# Altium PCB N20网关A.PcbDoc (part 2 of 2)
Units mil, origin at the board's own origin, x right, y up, seen from the top; angles counter-clockwise.
Board outline 6309.92 x 4341.03 mil, 2 copper layers (Top Layer, Bottom Layer); 157 components, 170 nets, 607 pads, 1300 vias.
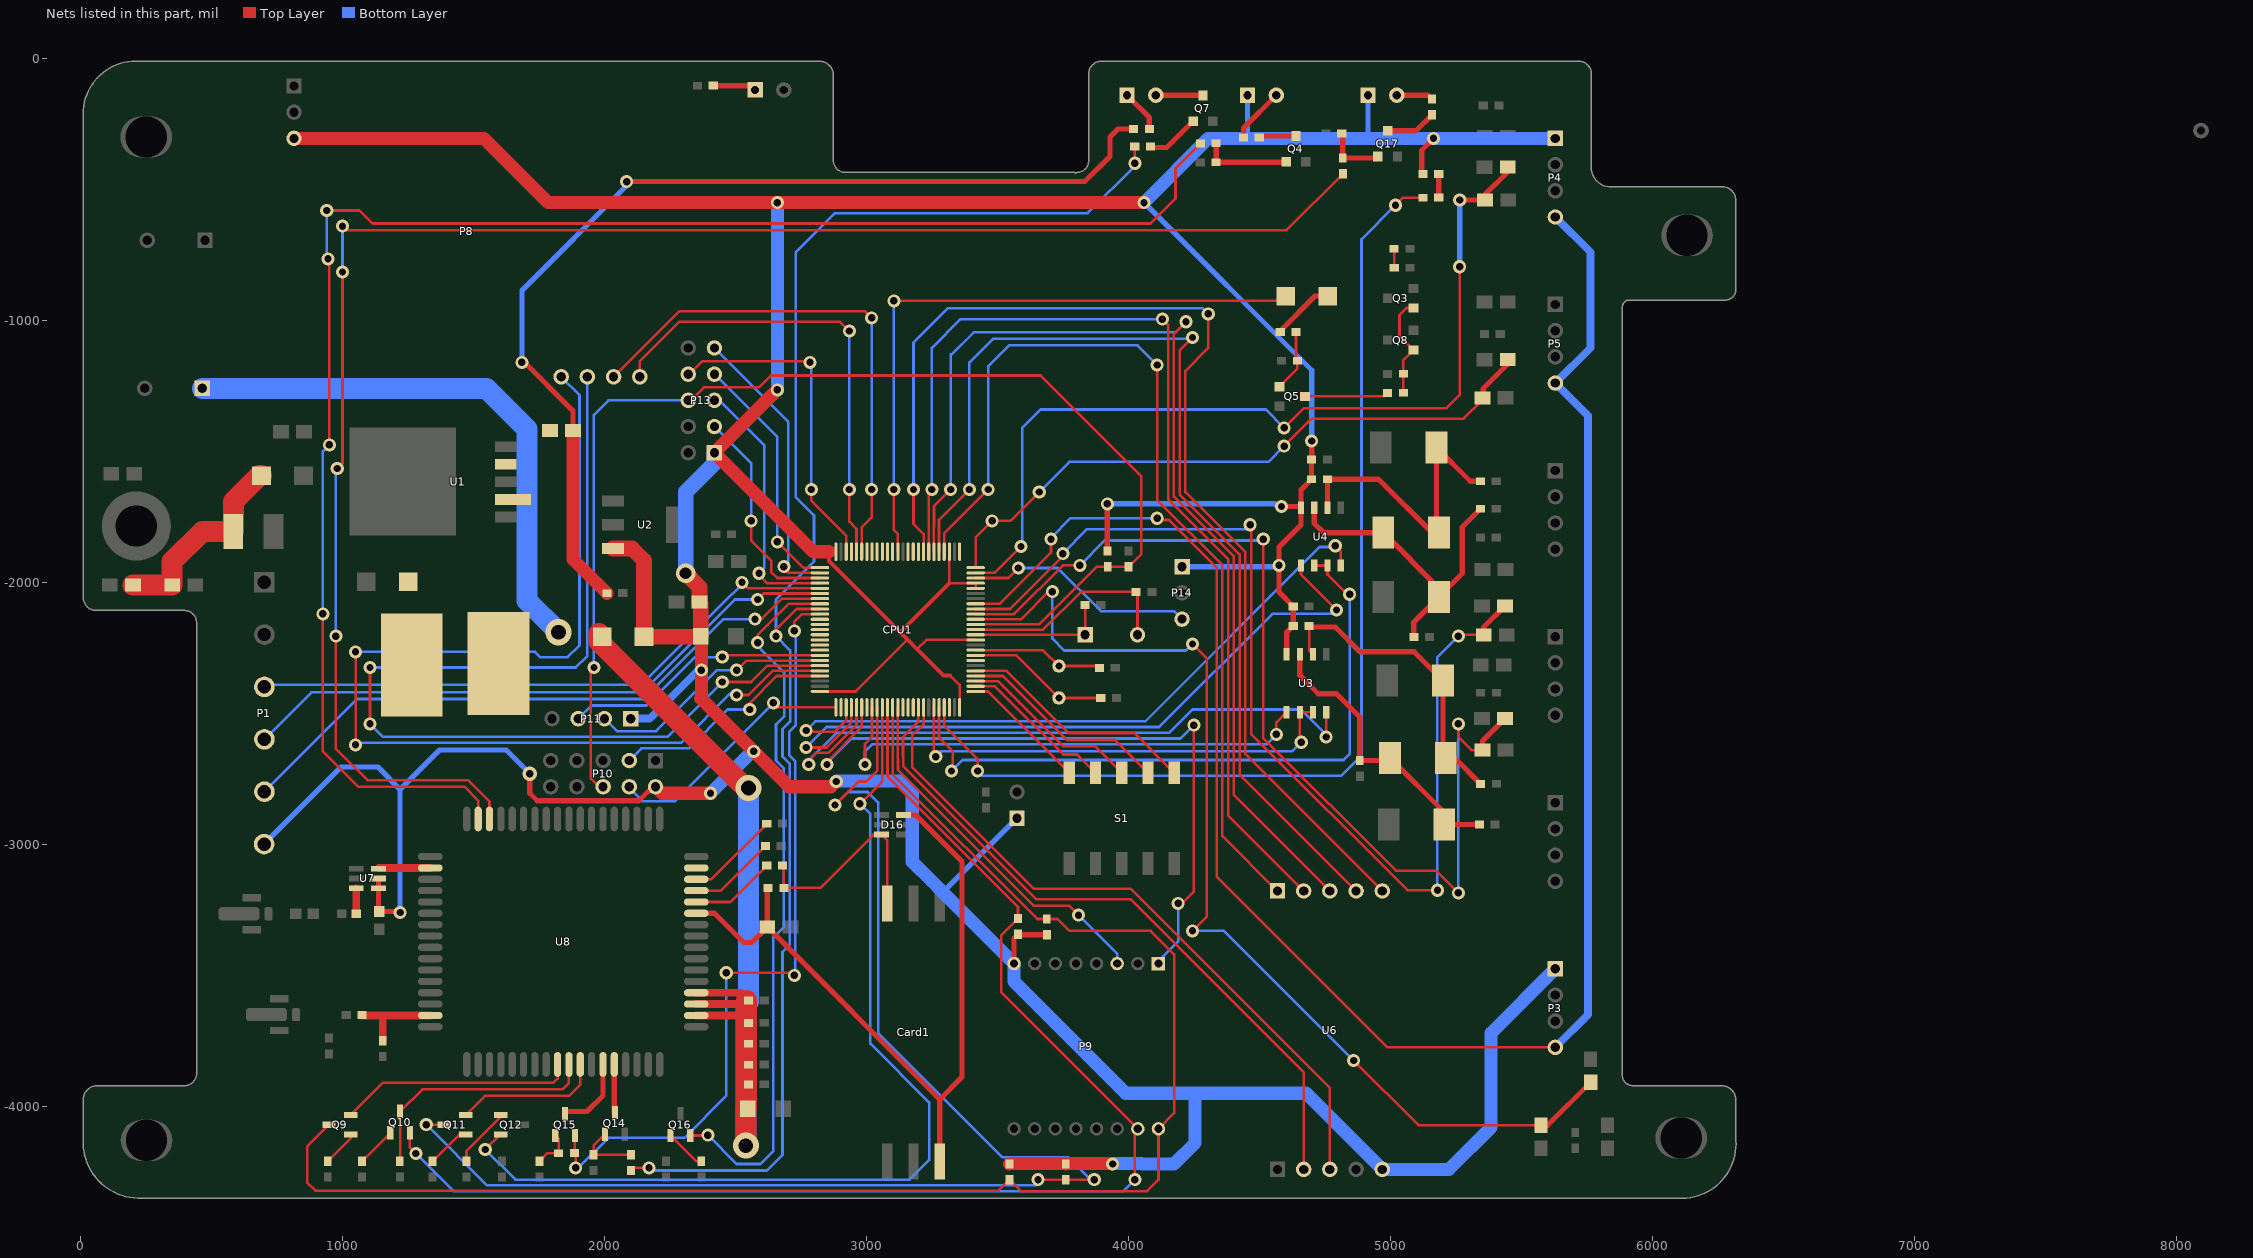
[diagram p2: the nets of this part, all layers, seen from the top]

## Via types
v1: diameter 28, hole 15, Top Layer to Bottom Layer, 1174 vias
v2: diameter 50, hole 28, Top Layer to Bottom Layer, 121 vias
v3: diameter 100, hole 56, Top Layer to Bottom Layer, 3 vias
v4: diameter 75, hole 45, Top Layer to Bottom Layer, 1 vias
v5: diameter 56, hole 28, Top Layer to Bottom Layer, 1 vias

## Nets (pads, with @x,y where several pads share a name; then routed paths per layer and width w, separated by ;. In a path a pad name is that pad's centre, name@x,y a point inside that pad or via, vN(x,y) a via of type N, cw(c..) or ccw(c..) an arc to the next point about the centre after c; other vN are vias at no path point) (continued)
NetCard1_6: Card1.6 D16.6 R46.1 R48.1 | length 809.6
  Top Layer w10: R46.1@2685,-3086 R48.1@2685,-3166 2825,-3166 3028.6,-2962.4 D16.6@3057.68,-2962.4 3080,-2984.72 Card1.6@3080,-3225.75
NetD2_1: D2.1 F1.1 R12.1 R13.1 | length 783.2
  Top Layer w80: R12.1@200,-2010 R13.1@350,-2010 350,-1920 465,-1805 F1.1@583.23,-1805 583.23,-1691.77 683.02,-1591.98 D2.1@690.98,-1591.98
NetD4_2: D4.2 L1.1 U1.2
NetD5_2: D5.2 D19.2 R20.1 R73.2 U3.7 | length 1137.9
  Top Layer w20: U3.7@4654.8,-2274.76 4654.8,-2354.8 4725,-2425 4795,-2425 4883.66,-2513.66 R73.2@4883.66,-2679.77 4988.93,-2679.77 D19.2@4998.7,-2670 5206.3,-2877.6 D5.2@5206.3,-2925 ; D5.2@5206.3,-2927.87 D5.2@5206.3,-2925 ; R20.1@5340,-2924 5207.3,-2924 D5.2@5206.3,-2925
NetD6_2: D6.2 D18.2 R3.1 R21.1 U4.7 | length 1266.9
  Top Layer w20: U4.7@4709.8,-1714.76 4709.8,-1774.8 4745,-1810 D18.2@4973.7,-1810 5186.3,-2022.6 D6.2@5186.3,-2055 ; R3.1@5090,-2209 5090,-2151.3 D6.2@5186.3,-2055 ; R21.1@5344.28,-1719 5275,-1788.28 5275,-1966.3 D6.2@5186.3,-2055
NetD8_2: D8.2 D19.1 R25.1 R72.1 U3.6 | length 1186.8
  Top Layer w10: R72.1@4694,-2170 R72.1@4690,-2166 4690,-2259.57 U3.6@4705.2,-2274.76 ; D19.1@5201.3,-2660 D19.1@5211.3,-2670 D19.1@5246,-2670
  Top Layer w20: R72.1@4694,-2170 4790,-2170 4885,-2265 5091.3,-2265 D8.2@5201.3,-2375 D19.1@5201.3,-2660 ; D19.1@5246,-2670 R25.1@5345,-2769
NetD9_2: D9.2 D18.1 R2.1 R26.1 U4.6 | length 1170.2
  Top Layer w20: U4.6@4760.2,-1714.76 4760,-1714.57 R2.1@4760,-1606 4955,-1606 5159,-1810 D18.1@5186.3,-1810 5176.3,-1800 D9.2@5176.3,-1485 5305.3,-1614 R26.1@5344.28,-1614
NetD10_2: D10.2 R51.2 | length 213.2
  Top Layer w20: R51.2@4439.77,-301.34 4439.77,-265.23 D10.2@4565,-140
NetD11_1: D11.1 R28.2 | length 166.5
  Top Layer w20: R28.2@2415.23,-103.66 2558.66,-103.66 D11.1@2575,-120
NetD12_1: D12.1 R29.1 | length 90
  Top Layer w20: D12.1@5185,-531 R29.1@5185,-441
NetD14_2: D14.2 R37.1 | length 240.3
  Top Layer w20: R37.1@4580,-1044 4580,-1040 4713.02,-906.98 D14.2@4761.21,-906.98
NetD15_1: D15.1 R40.2 | length 164
  Top Layer w20: D15.1@3995,-140 4080.23,-225.23 R40.2@4080.23,-268.66
NetD15_2: D15.2 Q7.3 | length 180
  Top Layer w20: D15.2@4105,-140 Q7.3@4285,-140
NetD17_2: D17.2 R71.2 | length 139.8
  Top Layer w20: D17.2@5025,-140 5143.89,-140 R71.2@5158.66,-154.77
NetL2_2: L2.2 U7.3 | length 97.6
  Top Layer w30: L2.2@1052.56,-3265 1052.68,-3264.88 U7.3@1052.68,-3167.4
NetLED1_2: LED1.2 R41.1 | length 72.8
  Top Layer w10: LED1.2@5014.77,-726.34 5014.77,-798.77 R41.1@5015,-799
NETLIGHT: R49.1 U8.51 | length 6373.7
  Top Layer w10: v2(925,-2120) 925,-2645 1060,-2780 1465,-2780 1518.07,-2833.07 U8.51@1518.07,-2902.99 ; v2(940,-580) 1065,-580 1115,-630 4085,-630 4180,-535 4180,-419 R49.1@4275,-324 ; v2(950,-1475) v2@950,-760
  Bottom Layer w10: v2(925,-2120) 925,-1500 v2(950,-1475) ; v2(940,-580) 940,-760 v2(945,-765)
NetQ3_2: Q3.2 Q8.2 R32.2 R34.1 | length 399.5
  Top Layer w10: R34.1@5050,-1276 5050.23,-1275.77 R32.2@5050.23,-1203.66 5050.23,-1150.6 Q8.2@5088.43,-1112.4 5036.02,-1060 5035,-1060 5035,-980 5062.6,-952.4 Q3.2@5088.43,-952.4
NetQ4_1: Q4.1 R49.2 R50.1 | length 337.9
  Top Layer w20: R50.1@4335,-396 Q4.1@4600.81,-396 ; R50.1@4335.23,-395.77 R49.2@4335.23,-323.66
NetQ4_3: Q4.3 R51.1 | length 134.8
  Top Layer w20: R51.1@4505.21,-295.79 Q4.3@4640,-295.79
NetQ5_2: Q5.2 R37.2 R39.2 | length 239.4
  Top Layer w10: Q5.2@4576.57,-1252.6 4645.23,-1183.94 R39.2@4645.23,-1153.66 4640.23,-1148.66 R37.2@4640.23,-1043.66
NetQ5_3: Q5.3 R34.2 | length 320.4
  Top Layer w10: Q5.3@4675,-1290 4976.11,-1290 R34.2@4989.77,-1276.34
NetQ7_1: Q7.1 R42.1 | length 188.3
  Top Layer w20: R42.1@4101,-340 4146.81,-340 Q7.1@4247.6,-239.21
NetQ9_1: Q9.1 R54.2 | length 138.7
  Top Layer w10: R54.2@943.66,-4209.77 1031.34,-4122.09 Q9.1@1031.34,-4107.4
NetQ10_1: Q10.1 R56.2 | length 153.6
  Top Layer w10: R56.2@1073.91,-4209.77 1074.17,-4209.77 Q10.1@1182.6,-4101.34
NetQ11_1: Q11.1 R58.2 | length 170.1
  Top Layer w10: R58.2@1343.66,-4209.77 1446.03,-4107.4 Q11.1@1471.34,-4107.4
NetQ12_1: Q12.1 R60.2 | length 231
  Top Layer w10: R60.2@1473.66,-4209.77 1473.66,-4171.34 1603.66,-4041.34 Q12.1@1603.66,-4032.6
NetQ14_1: Q14.1 R63.1 R64.2 | length 238.7
  Top Layer w10: R64.2@1958.66,-4184.77 1958.66,-4150.28 Q14.1@2002.6,-4106.34 ; R64.2@1958.89,-4185 R63.1@2101,-4185
NetQ15_1: Q15.1 R65.1 R66.2 | length 158.2
  Top Layer w10: R66.2@1752.32,-4209.77 1783.09,-4179 R65.1@1825,-4179 1825,-4123.74 Q15.1@1812.6,-4111.34
NetQ16_1: Q16.1 R68.2 | length 157.8
  Top Layer w10: Q16.1@2252.6,-4111.34 2351.03,-4209.77 R68.2@2369.66,-4209.77
NetQ17_1: Q17.1 R69.2 R70.1 | length 218.5
  Top Layer w20: R70.1@4818.66,-289.66 R69.2@4818.66,-379.77 Q17.1@4947.04,-379.77
NetQ17_3: Q17.3 R71.1 | length 194.2
  Top Layer w20: Q17.3@4990,-275.79 5098.21,-275.79 R71.1@5159,-215
NetR1_2: R1.2 U1.4
NIRQ: CPU1.33 U6.5 | length 4552.6
  Top Layer w10: v2(3180,-1645) 3180,-1776.89 3218.43,-1815.32 CPU1.33@3218.43,-1882.76 ; v2(4305,-975) 4305,-1105 4218,-1192 4218,-1654.66 4447,-1883.66 4447,-2655.31 U6.5@4969.49,-3177.8
  Bottom Layer w10: v2(3180,-1645) 3180,-1085 3312,-953 4283,-953 v2(4305,-975)
NRST: C26.2 CPU1.14 P10.8 P13.8 R43.2 | length 4805.3
  Top Layer w10: v2(1960,-2325) 1948.47,-2336.53 1948.47,-2748.47 1980,-2780 P10.8@1995,-2780 ; P13.8@2320,-1305 2330,-1305 2380,-1255 2590,-1255 2635,-1210 3665,-1210 4050,-1595 4050,-1891.57 C26.2@4001.34,-1940.23 R43.2@3921.34,-1940.23 3921.11,-1940 3880,-1940 3659.69,-2160.31 CPU1.14@3417.24,-2160.31
  Bottom Layer w10: v2(1960,-2325) 1960,-1360 2015,-1305 P13.8@2320,-1305
NSEL: CPU1.29 U6.1 | length 3685.6
  Top Layer w10: CPU1.29@3297.17,-1882.76 3297.17,-1812.83 v2(3465,-1645) ; v2(4110,-1170) 4110,-1685 4359,-1934 4359,-2969 4567.8,-3177.8 U6.1@4569.49,-3177.8
  Bottom Layer w10: v2(3465,-1645) 3465,-1175 3545,-1095 4035,-1095 v2(4110,-1170)
NTRST: CPU1.90
OSC32_IN: C24.2 CPU1.8 Y2.1 | length 544.6
  Top Layer w10: CPU1.8@3417.24,-2278.43 3572.4,-2278.43 Y2.1@3735,-2441.02 C24.2@3894.45,-2441.02
OSC32_OUT: C25.2 CPU1.9 Y2.2 | length 490.3
  Top Layer w10: CPU1.9@3417.24,-2258.74 3675,-2258.74 3675,-2258.98 Y2.2@3735,-2318.98 C25.2@3882.41,-2318.98
OSC_IN: C16.2 CPU1.12 Y1.1 | length 531.3
  Top Layer w10: CPU1.12@3417.24,-2199.68 3834.68,-2199.68 Y1.1@3835,-2200 C16.2@3835,-2086.57
OSC_OUT: C17.2 CPU1.13 Y1.2 | length 837.9
  Top Layer w10: CPU1.13@3417.24,-2180 3675,-2180 3818.66,-2036.34 C17.2@4029.77,-2036.34 4035,-2041.57 Y1.2@4035,-2200
PA0: CPU1.23 P14.3 | length 884.3
  Top Layer w10: CPU1.23@3417.24,-1983.15 3541.85,-1983.15 v2(3580,-1945)
  Bottom Layer w10: v2(3580,-1945) 3730,-1945 3895,-2110 4175,-2110 P14.3@4205,-2140
PA1: CPU1.24 R11.2 R77.2 | length 3433.5
  Top Layer w10: CPU1.24@3417.24,-1963.46 3489.69,-1963.46 v2(3590,-1863.15) ; v2(4595,-1410) 4670,-1335 5215,-1335 5265,-1285 v2(5265,-795)
  Top Layer w20: v2(5265.28,-540.28) R77.2@5361.96,-540.28 5361.96,-519.69 R11.2@5448.27,-433.38
  Bottom Layer w10: v2@3595,-1858.15 3595,-1410 3665,-1340 4525,-1340 v2(4595,-1410)
  Bottom Layer w20: v2(3590,-1863.15) v2@3595,-1858.15 ; v2(5265,-795) 5265.28,-794.72 v2(5265.28,-540.28)
PA2: CPU1.25 R9.2 R78.2 | length 2461.2
  Top Layer w10: CPU1.25@3417.24,-1943.78 3417.24,-1827.76 v2(3480,-1765) 3550,-1765 v2(3660,-1655) ; v2(4595,-1480) 4700,-1375 5280,-1375 R78.2@5351.96,-1303.04
  Top Layer w20: R78.2@5351.96,-1303.04 R78.2@5351.96,-1295.28 5355,-1292.24 5355,-1260 5448.04,-1166.96 R9.2@5448.04,-1149.72
  Bottom Layer w10: v2(3660,-1655) 3775,-1540 4535,-1540 v2(4595,-1480)
PA3: CPU1.26
PA5: CPU1.30 U6.4 | length 4073.8
  Top Layer w10: CPU1.30@3277.48,-1882.76 3277.48,-1760.85 v2(3393.33,-1645) ; v2(4245,-1065) 4196,-1114 4196,-1663.77 4425,-1892.77 4425,-2733.31 U6.4@4869.49,-3177.8
  Bottom Layer w10: v2(3393.33,-1645) 3393.33,-1160 3483.33,-1070 4240,-1070 v2(4245,-1065)
PA6: CPU1.31 U6.3 | length 4168.1
  Top Layer w10: CPU1.31@3257.8,-1882.76 3257.8,-1787.2 3258.11,-1786.89 ; 3258.11,-1787.2 3258.11,-1786.89 ; v2(3321.67,-1645) 3258.11,-1708.56 3258.11,-1786.89 ; v2(4220,-1005) 4174,-1051 4174,-1672.89 4403,-1901.89 4403,-2811.31 U6.3@4769.49,-3177.8
  Bottom Layer w10: v2(3321.67,-1645) 3321.67,-1130 3325,-1130 3410,-1045 4180,-1045 v2(4220,-1005)
PA7: CPU1.32 U6.2 | length 4114.5
  Top Layer w10: CPU1.32@3238.11,-1882.76 3238.11,-1656.89 v2(3250,-1645) ; v2(4130,-995) 4152,-1017 4152,-1682 4381,-1911 4381,-2889.31 U6.2@4669.49,-3177.8
  Bottom Layer w10: v2(3250,-1645) 3250,-1105 3360,-995 v2(4130,-995)
PA8: CPU1.67
PA9: CPU1.68 P11.3 | length 1022.8
  Top Layer w10: v2(2450,-2285) 2456.57,-2278.43 CPU1.68@2822.76,-2278.43
  Bottom Layer w10: P11.3@1900,-2520 1950,-2470 2160,-2470 2345,-2285 v2(2450,-2285)
PA10: CPU1.69 P11.2 | length 955.7
  Top Layer w10: v2(2505,-2335) 2541.57,-2298.43 2731.57,-2298.43 ; 2733.29,-2298.43 2731.57,-2298.43 ; CPU1.69@2822.76,-2298.11 2731.89,-2298.11 2731.57,-2298.43
  Bottom Layer w10: P11.2@2000,-2520 2047.47,-2567.47 2196.92,-2567.47 2429.4,-2335 v2(2505,-2335)
PA11: CPU1.70 P8.3 | length 3979.4
  Top Layer w10: v2(1105,-2540) v2(1105,-2325) ; v2(2450,-2380) 2560,-2380 2622.2,-2317.8 CPU1.70@2822.76,-2317.8
  Bottom Layer w10: v2(1105,-2540) 1154.47,-2589.47 2240.53,-2589.47 v2(2450,-2380) ; v2(1105,-2325) 1890,-2325 1935,-2280 P8.3@1935,-1215
PA12: CPU1.71 P8.2 | length 4184.8
  Top Layer w10: v2(1050,-2620) v2(1050,-2265) ; v2(2505,-2430) 2550,-2430 2642.52,-2337.48 CPU1.71@2822.76,-2337.48
  Bottom Layer w10: v2(1050,-2620) 1058.53,-2611.47 2293.53,-2611.47 2480,-2425 2500,-2425 v2(2505,-2430) ; v2(1050,-2265) 1735,-2265 1755,-2285 1860,-2285 1905,-2240 1905,-1285 P8.2@1835,-1215
PB0: CPU1.35
PB1: CPU1.36
PB5: CPU1.91
PB6: CPU1.92 U6.7 | length 2632.3
  Top Layer w10: CPU1.92@3198.74,-2477.24 3198.74,-2531.26 3140,-2590 3140,-2665.46 3140.63,-2666.09 3140.63,-2700.63 3650,-3210 4010,-3210 4669.49,-3869.49 U6.7@4669.49,-4240.79
PB7: CPU1.93 U6.8 | length 2658.7
  Top Layer w10: CPU1.93@3218.43,-2477.24 3218.43,-2541.57 3175,-2585 3175,-2705 3640,-3170 4010,-3170 4769.49,-3929.49 U6.8@4769.49,-4240.79
PB8: CPU1.95 U3.2 U3.3 | length 1775.8
  Top Layer w10: CPU1.95@3257.8,-2477.24 3257.8,-2657.8 v2(3265,-2665) ; v2(4660,-2610) 4654.8,-2604.8 U3.2@4654.8,-2495.24 U3.3@4705.2,-2495.24
  Bottom Layer w10: v2(3265,-2665) 3285,-2645 4625,-2645 v2(4660,-2610)
PB9: CPU1.96 U4.2 U4.3 | length 2624.6
  Top Layer w10: CPU1.96@3277.48,-2477.24 3277.48,-2592.48 3330,-2645 3330,-2715 v2(3325,-2720) ; U4.2@4709.8,-1935.24 U4.3@4760.2,-1935.24 4760.2,-1970.2 4835,-2045 v2(4845,-2045)
  Bottom Layer w10: v2(3325,-2720) 3367,-2678 4822,-2678 4845,-2655 v2(4845,-2045)
PB10: CPU1.47
PB11: CPU1.48 P13.9 | length 1267.8
  Top Layer w10: P13.9@2320,-1205 2325,-1205 2375,-1155 2780,-1155 v2(2785,-1160) ; v2(2790,-1645) 2790,-1688.28 2923.15,-1821.43 CPU1.48@2923.15,-1882.76
  Bottom Layer w10: v2(2785,-1160) 2790,-1165 v2(2790,-1645)
PB12: CPU1.51 P13.4 | length 943.1
  Top Layer w10: v2(2660,-1845) 2758.78,-1943.78 CPU1.51@2822.76,-1943.78
  Bottom Layer w10: P13.4@2420,-1205 2660,-1445 v2(2660,-1845)
PB13: CPU1.52 P13.5 | length 1109.3
  Top Layer w10: v2(2685,-1940) 2685,-1945 2703.46,-1963.46 CPU1.52@2822.76,-1963.46
  Bottom Layer w10: P13.5@2420,-1105 2702,-1387 2702,-1923 v2(2685,-1940)
PB14: CPU1.53 P13.2 | length 840.3
  Top Layer w10: v2(2560,-1765) 2560,-1840 2636.87,-1916.87 2636.87,-1959.98 2660,-1983.15 CPU1.53@2822.76,-1983.15
  Bottom Layer w10: P13.2@2420,-1405 2560,-1545 v2(2560,-1765)
PB15: CPU1.54 P13.3 | length 1011.5
  Top Layer w10: v2(2590,-1965) 2590,-1972.5 2620.33,-2002.83 CPU1.54@2822.76,-2002.83
  Bottom Layer w10: P13.3@2420,-1305 2440,-1305 2610,-1475 2610,-1945 v2(2590,-1965)
PC0: CPU1.15 R10.2 R76.2 | length 4116.6
  Top Layer w10: CPU1.15@3417.24,-2140.63 3589.37,-2140.63 3695,-2035 v2(3710,-2035) ; v2(4245,-3330) 4300,-3275 4300,-2290 v2(4245,-2235) ; v2(4860,-3825) 5106.96,-4071.96 R10.2@5574.72,-4071.96
  Top Layer w20: R10.2@5574.72,-4071.96 5601.36,-4071.96 R76.2@5765.28,-3908.04
  Bottom Layer w10: v2(3710,-2035) 3710,-2215 3755,-2260 4220,-2260 v2(4245,-2235) ; v2(4245,-3330) 4365,-3330 v2(4860,-3825)
PC1: CPU1.16 R8.2 R75.2 | length 3936
  Top Layer w10: CPU1.16@3417.24,-2120.94 3564.06,-2120.94 3750,-1935 v2(3815,-1935) ; v2(4515,-1835) 4515,-2593.89 5021.11,-3100 5175,-3100 v2(5260,-3185) ; v2(5260,-2540) 5260,-2590 5310.28,-2640.28 R75.2@5351.96,-2640.28
  Top Layer w20: R75.2@5351.96,-2640.28 5351.96,-2605.8 R8.2@5438.04,-2519.72
  Bottom Layer w10: v2(3815,-1935) 3910,-1840 4510,-1840 v2(4515,-1835) ; v2(5260,-2540) v2(5260,-3185) v2@5265,-3190
PC2: CPU1.17 R7.2 R74.2 | length 4191.4
  Top Layer w10: CPU1.17@3417.24,-2101.26 3548.74,-2101.26 3750,-1900 v2(3750,-1890) ; v2(4465,-1780) 4469,-1784 4469,-2579 5065,-3175 v2(5180,-3175) ; v2@5264.72,-2200.28 R74.2@5356.96,-2200.28
  Top Layer w20: v2(5260,-2205) v2@5264.72,-2200.28 ; R74.2@5356.96,-2200.28 5356.96,-2170.8 R7.2@5438.04,-2089.72
  Bottom Layer w10: v2(3750,-1890) 3843,-1797 4448,-1797 v2(4465,-1780) ; v2(5180,-3175) 5180,-2285 v2(5260,-2205)
PC3: CPU1.18 P3.4 P4.4 P5.4 | length 7330.2
  Top Layer w10: CPU1.18@3417.24,-2081.57 3509.69,-2081.57 ; 3509.69,-2081.26 3510,-2081.26 3705,-1886.26 v2(3705,-1835) ; v2(4110,-1755) 4098.28,-1755 4091.64,-1761.64 4155.53,-1761.64 4337,-1943.11 4337,-3122 4990,-3775 P3.4@5630,-3775
  Bottom Layer w10: v2(3705,-1835) 3705,-1830 3780,-1755 v2(4110,-1755)
  Bottom Layer w30: P3.4@5630,-3775 5755,-3650 5755,-1364 P5.4@5630,-1239 5765,-1104 5765,-740 P4.4@5630,-605
PC5: CPU1.34
PC6: CPU1.63
PC7: CPU1.64
PC8: CPU1.65
PC9: CPU1.66
PC10: CPU1.78 U4.4 | length 2636.4
  Top Layer w10: v2(2770,-2565) 2775,-2570 2880,-2570 2923.15,-2526.85 CPU1.78@2923.15,-2477.24 ; v2(4790,-1860) 4810.59,-1880.59 U4.4@4810.59,-1935.24
  Bottom Layer w10: v2(2770,-2565) 2805,-2530 4065,-2530 4730,-1865 v2@4810,-1865
PC11: CPU1.79 U4.1 | length 2738.6
  Top Layer w10: v2(2770,-2630) 2848.28,-2630 2942.83,-2535.45 CPU1.79@2942.83,-2477.24 ; U4.1@4659.41,-1935.24 4659.41,-1969.41 v2(4795,-2105)
  Bottom Layer w10: v2(2770,-2630) 2848,-2552 4118,-2552 4550,-2120 4780,-2120 v2(4795,-2105)
PC12: CPU1.80 U3.4 | length 2535.8
  Top Layer w10: v2(2780,-2695) 2780,-2680 2810,-2650 2856.57,-2650 2962.52,-2544.05 CPU1.80@2962.52,-2477.24 ; v2(4755,-2590) 4755,-2495.83 U3.4@4755.59,-2495.24
  Bottom Layer w10: v2(2780,-2695) 2780,-2680 2886,-2574 4156,-2574 4245,-2485 4660,-2485 4755,-2580 v2(4755,-2590)
PC13: CPU1.7
PD0: CPU1.81 P9.1 | length 2712.3
  Top Layer w10: v2(2850,-2695) 2850,-2684.85 2982.2,-2552.65 CPU1.81@2982.2,-2477.24 ; v2(4190,-3225) 4205,-3225 4250,-3180 v2(4250,-2545)
  Bottom Layer w10: v2(2850,-2695) 2850,-2690 2944,-2596 4199,-2596 v2(4250,-2545) ; P9.1@4115,-3455 4115,-3445 4190,-3370 v2(4190,-3225)
PD1: CPU1.82
PD2: CPU1.83 U3.1 | length 1990.8
  Top Layer w10: v2(2995,-2695) 2995,-2616.26 3021.26,-2590 ; 3021.57,-2590 CPU1.83@3021.57,-2477.24 ; v2(4565,-2580) 4565,-2534.65 U3.1@4604.41,-2495.24
  Bottom Layer w10: v2@3005,-2705 v2(2995,-2695) 2995,-2645 3022,-2618 4527,-2618 v2(4565,-2580)
PD3: CPU1.84 Q11.3 R57.2 | length 5336.6
  Top Layer w10: v2(1320,-4070) Q11.3@1388.66,-4070 ; v2(2880,-2850) 2970,-2760 3000,-2760 3040.94,-2719.06 3040.94,-2664.06 ; 3041.26,-2663.74 CPU1.84@3041.26,-2477.24 ; v2(3655,-4280) 3660.46,-4280 3665.46,-4285 3670.23,-4280.23 R57.2@3761.34,-4280.23 3766.57,-4275 3771.57,-4280 v2(3870,-4280)
  Bottom Layer w10: v2(1320,-4070) 1551.71,-4301.71 3648.29,-4301.71 3655,-4295 v2(3655,-4280) ; v2(2880,-2850) 2930,-2800 3005,-2800 3045,-2840 3045,-3720 3520,-4195 3770,-4195 3855,-4280 v2(3870,-4280)
PD4: CPU1.85 Q12.2 | length 3729.1
  Top Layer w10: v2(1545,-4165) 1602.6,-4107.4 Q12.2@1603.66,-4107.4 ; v2(2975,-2845) 3060.94,-2759.06 CPU1.85@3060.94,-2477.24
  Bottom Layer w10: v2(1545,-4165) 1659.71,-4279.71 3165.29,-4279.71 3240,-4205 3240,-3985 3015,-3760 3015,-2885 v2(2975,-2845)
PD5: CPU1.86 P9.4 Q10.2 R24.2 | length 5169.7
  Top Layer w10: Q10.2@1257.4,-4101.34 1257.4,-4157.4 v2(1280,-4180) ; CPU1.86@3080.63,-2477.24 3080.63,-2740.63 3578.66,-3238.66 R24.2@3578.66,-3283.2 3515,-3346.86 3515,-3564.84 P9.4@4036.26,-4086.1 4040,-4089.84 4025,-4104.84 v2(4025,-4280)
  Bottom Layer w10: v2(1280,-4180) 1423.71,-4323.71 3981.29,-4323.71 v2(4025,-4280)
PD6: CPU1.87 P9.2 Q9.3 R23.2 R53.2 | length 6070.6
  Top Layer w10: Q9.3@948.66,-4070 865,-4153.66 865,-4290 897,-4322 3504.57,-4322 R53.2@3546.34,-4280.23 3589.82,-4323.71 4071.29,-4323.71 4115,-4280 P9.2@4115,-4086.1 4175,-4026.1 4175,-3420 4085,-3330 3775,-3330 3729.77,-3284.77 R23.2@3688.66,-3284.77 3653.06,-3284.77 3100.63,-2732.35 3100.63,-2625.63 3100.32,-2625.32 CPU1.87@3100.32,-2477.24
PD7: CPU1.88 P9.5 | length 1402.9
  Top Layer w10: 3120,-2675 CPU1.88@3120,-2477.24 ; 3120.63,-2675.63 3120.63,-2715.63 3640,-3235 3775,-3235 v2(3810,-3270)
  Bottom Layer w10: v2(3810,-3270) 3957.52,-3417.52 P9.5@3957.52,-3455
PD8: CPU1.55 P1.3 | length 2305.3
  Top Layer w10: v2(2525,-2000) 2547.52,-2022.52 CPU1.55@2822.76,-2022.52
  Bottom Layer w10: P1.3@702,-2399 702,-2390 2141.72,-2390 2488.72,-2043 2490,-2043 2525,-2008 v2(2525,-2000)
PD9: CPU1.56 P1.4 | length 2351.4
  Top Layer w10: v2(2585,-2065) 2607.8,-2042.2 CPU1.56@2822.76,-2042.2
  Bottom Layer w10: P1.4@702,-2599 881,-2420 2142.83,-2420 2497.83,-2065 v2(2585,-2065)
PD10: CPU1.57 P1.5 | length 2444.1
  Top Layer w10: v2@2582.2,-2125 2575,-2132.2 v2(2575,-2140) 2599.2,-2140 2677.31,-2061.89 CPU1.57@2822.76,-2061.89
  Bottom Layer w10: P1.5@702,-2799 1056,-2445 2150,-2445 2455,-2140 v2(2575,-2140)
PD11: CPU1.58 Q16.2 | length 2725.7
  Top Layer w10: Q16.2@2327.4,-4111.34 2393.66,-4111.34 v2(2395,-4110) ; v2(2585,-2230) 2585,-2200 2703.43,-2081.57 CPU1.58@2822.76,-2081.57
  Bottom Layer w10: v2(2395,-4110) 2505,-4220 2595,-4220 2645,-4170 2645,-3355 2685,-3315 2685,-2710 2655,-2680 2655,-2542 2687,-2510 2687,-2345 2585,-2243 v2(2585,-2230)
PE0: CPU1.97 D12.2 | length 4071.2
  Top Layer w10: CPU1.97@3297.17,-2477.24 3297.17,-2547.17 3425,-2675 v2(3425,-2720) ; v2(5020,-560) 5048.66,-531.34 D12.2@5124.77,-531.34
  Bottom Layer w10: v2(3425,-2720) 3443.28,-2738.28 4811.72,-2738.28 4890,-2660 4890,-690 v2(5020,-560)
PE1: CPU1.98
PE2: CPU1.1 S1.10 | length 486.4
  Top Layer w10: CPU1.1@3417.24,-2416.22 3464.45,-2416.22 S1.10@3775,-2726.77
PE3: CPU1.2 S1.9 | length 594.5
  Top Layer w10: CPU1.2@3417.24,-2396.54 3491.54,-2396.54 3751.77,-2656.77 3805,-2656.77 S1.9@3875,-2726.77
PE4: CPU1.3 S1.8 | length 702.7
  Top Layer w10: CPU1.3@3417.24,-2376.85 3501.85,-2376.85 3750,-2625 3873.23,-2625 S1.8@3975,-2726.77
PE5: CPU1.4 S1.7 | length 810.9
  Top Layer w10: CPU1.4@3417.24,-2357.17 3522.17,-2357.17 3766.77,-2601.77 3950,-2601.77 S1.7@4075,-2726.77
PE6: CPU1.5 S1.6 | length 919
  Top Layer w10: CPU1.5@3417.24,-2337.48 3535,-2337.48 3772.52,-2575 4023.23,-2575 S1.6@4175,-2726.77
PE7: CPU1.38 D14.1 | length 2467.4
  Top Layer w10: v2(3105,-1645) 3105,-1800 3120,-1815 CPU1.38@3120,-1882.76 ; v2(3105,-925) 4582.96,-925 D14.1@4600.98,-906.98
  Bottom Layer w10: v2(3105,-1645) v2(3105,-925)
PE8: CPU1.39
PE9: CPU1.40
PE10: CPU1.41
PE11: CPU1.42
PE12: CPU1.43
PE13: CPU1.44
PE14: CPU1.45 P8.4 | length 2007.3
  Top Layer w10: P8.4@2035,-1215 2285,-965 2995,-965 v2(3020,-990) ; CPU1.45@2982.2,-1882.76 2982.2,-1790.32 3020,-1752.52 v2(3020,-1645)
  Bottom Layer w10: v2(3020,-1645) v2(3020,-990)
PE15: CPU1.46 P8.5 | length 1790.8
  Top Layer w10: P8.5@2135,-1215 2135,-1155 2285,-1005 2900,-1005 v2(2935,-1040) ; v2(2935,-1645) 2935,-1767.8 2962.52,-1795.32 CPU1.46@2962.52,-1882.76
  Bottom Layer w10: v2(2935,-1645) v2(2935,-1040)
POW_ON: CPU1.59 R42.2 R63.2 | length 5936.4
  Top Layer w10: R63.2@2101.34,-4245.23 2111.57,-4235 v2(2170,-4235) ; v2(2655,-2205) 2655,-2180 2733.74,-2101.26 CPU1.59@2822.76,-2101.26 ; R42.2@4024.77,-336.34 4025,-336.57 v2(4025,-400)
  Bottom Layer w10: v2(2170,-4235) 2170,-4240 2175,-4245 2620,-4245 2680,-4185 2680,-3410 2707,-3383 2707,-2692 2680,-2665 2680,-2560 2709,-2531 2709,-2259 v2(2655,-2205) 2655,-2065 2800,-1920 2800,-1743.64 2730,-1673.64 2730,-740 2880,-590 3845,-590 4025,-410 v2(4025,-400)
PWRKEY: Q14.3 U8.14 | length 181.4
  Top Layer w20: Q14.3@2037.76,-4021.42 U8.14@2037.76,-3840
RESET: Q15.3 U8.13 | length 280.3
  Top Layer w20: Q15.3@1858.66,-4020 1933.9,-4020 1994.45,-3959.45 U8.13@1994.45,-3840
RESET_CTL: CPU1.60 Q15.2 R65.2 | length 3034.2
  Top Layer w10: Q15.2@1887.4,-4111.34 1887.4,-4176.49 R65.2@1885.23,-4178.66 1890,-4183.43 v2(1890,-4235) ; v2(2465,-3490) 2715,-3490 v2(2725,-3500) ; v2(2725,-2185) 2725,-2150 2754.06,-2120.94 CPU1.60@2822.76,-2120.94
  Bottom Layer w10: v2(1890,-4235) 1900,-4235 2015,-4120 2305,-4120 2465,-3960 v2(2465,-3490) ; v2(2725,-3500) 2729,-3496 2729,-2682.89 2705,-2658.89 2705,-2570.6 2731,-2544.6 2731,-2191 v2(2725,-2185)
RF_GNSS: U7.6 U8.54 | length 195.1
  Top Layer w30: U7.6@1139.92,-3090 U8.54@1335,-3090
RF_MAIN: C29.2 R52.1 U8.67 | length 356.3
  Top Layer w30: R52.1@1075,-3651 1076.99,-3652.99 U8.67@1335,-3652.99 ; C29.2@1153.66,-3749.77 1153.66,-3654.33
RING: R69.1 U8.50 | length 6656
  Top Layer w10: v2(975,-2205) 975,-2635 1095,-2755 1480,-2755 1561.38,-2836.38 U8.50@1561.38,-2902.99 ; v2(980,-1565) 1000,-1545 v2(1000,-815) ; v2(1000,-640) 1015,-655 4604,-655 R69.1@4819,-440
  Bottom Layer w10: v2(975,-2205) 975,-1570 v2(980,-1565) ; v2(1000,-815) v2(1000,-640)
RTS: Q11.2 U8.11 | length 561.5
  Top Layer w10: Q11.2@1471.34,-4032.6 1543.94,-3960 1865,-3960 1907.83,-3917.17 U8.11@1907.83,-3840
RXD: Q10.3 R55.2 U8.10 | length 948.6
  Top Layer w10: R55.2@1220,-4208.43 Q10.3@1220,-4018.66 ; Q10.3@1220.94,-4018.66 1304.61,-3935 1840,-3935 1864.53,-3910.47 U8.10@1864.53,-3840
SWCLK: CPU1.76 P10.7 | length 977
  Top Layer w10: v2(2645,-2460) 2662.24,-2477.24 CPU1.76@2883.78,-2477.24
  Bottom Layer w10: P10.7@2095,-2780 2095,-2785 2145,-2835 2270,-2835 v2(2645,-2460)
SWDIO: CPU1.72 P10.2 | length 876.1
  Top Layer w10: v2(2555,-2485) 2555,-2460 2657.83,-2357.17 CPU1.72@2822.76,-2357.17
  Bottom Layer w10: P10.2@2095,-2680 2141.53,-2633.47 2322.13,-2633.47 2470.6,-2485 v2(2555,-2485)
TDI: CPU1.77
TDO: CPU1.89
TERM_ON_CTL: CPU1.61
TXD: Q9.2 U8.9 | length 901.2
  Top Layer w10: Q9.2@1031.34,-4032.6 1153.94,-3910 1805,-3910 1821.22,-3893.78 U8.9@1821.22,-3840
UIM_CLK: R44.2 U8.31 | length 334.6
  Top Layer w10: U8.31@2350.75,-3176.61 2444.5,-3176.61 R44.2@2614.77,-3006.34
UIM_DATA: R46.2 U8.30 | length 326.4
  Top Layer w10: U8.30@2350.75,-3219.92 2481.19,-3219.92 R46.2@2619.77,-3081.34
UIM_PRESENT: U8.33
UIM_RESET: R45.2 U8.32 | length 356.8
  Top Layer w10: U8.32@2350.75,-3133.31 2407.8,-3133.31 R45.2@2619.77,-2921.34
VBAT: C3.2 C4.1 C19.1 C20.2 C21.2 C22.2 C23.2 D3.1 L1.2 R1.1 R38.2 R40.1 U8.20 U8.21 U8.22 | length 9338.6
  Top Layer w20: v2@1685,-1150 1880,-1345 R1.1@1880,-1420 ; v2(2085,-470) 3833.42,-470 3930,-373.42 3930,-300 3961,-269 R40.1@4020,-269
  Top Layer w30: U8.20@2350.75,-3652.99 2521.42,-3652.99 ; U8.21@2350.75,-3609.68 R38.2@2536.43,-3609.68 ; U8.22@2350.75,-3566.38 2519.81,-3566.38 R38.2@2549.77,-3596.34
  Top Layer w50: R1.1@1880,-1420 1880,-1911.57 C3.2@2009.77,-2041.34
  Top Layer w80: D3.1@1980,-2195 1980,-2225 v3@2520,-2765 ; v3(2540,-4150) C19.1@2540,-4012.32 ; C19.1@2542.5,-4004.82 R38.2@2542.5,-3596.34
  Bottom Layer w20: v2(1685,-1160) 1685,-885 2085,-485 v2(2085,-470)
  Bottom Layer w80: C4.1@465.24,-1259.21 1549.21,-1259.21 1705,-1415 1705,-2070 v3(1825,-2190) ; v3(2540,-4150) 2540,-3610 2550,-3600 ; 2550,-3590 v3(2550,-2785)
VCC: C5.2 C28.2 C31.2 C32.2 CPU1.11 CPU1.21 CPU1.22 CPU1.28 CPU1.50 CPU1.75 CPU1.100 D1.1 D3.2 D10.1 D17.1 P1.6 P3.1 P4.1 P8.7 P9.15 P10.6 P11.1 P12.1 P13.1 P14.1 R2.2 R23.1 R24.1 R29.2 R43.1 R53.1 R57.1 R72.2 U2.3 U3.8 U4.8 U6.10 U7.4 U7.5 | length 23816.3
  Top Layer w10: CPU1.75@2822.76,-2416.22 2958.78,-2416.22 3155,-2220 3155,-2216.22 ; 3193.78,-2255 3229.41,-2219.37 CPU1.11@3417.24,-2219.37 ; CPU1.28@3316.85,-1882.76 3316.85,-2002.83 CPU1.22@3417.24,-2002.83 CPU1.21@3417.24,-2022.52 ; 3320,-2355 3356.22,-2391.22 CPU1.100@3356.22,-2477.24 ; v2@3920,-1720 v2(3920,-1700) ; R43.1@3921,-1880 R43.1@3926,-1885 ; U4.8@4654.65,-1710 U4.8@4659.41,-1714.76
  Top Layer w15: 2857.76,-1882.76 2857.76,-1918.98 3128.78,-2190 ; 3316.85,-2002.83 3129.68,-2190 3128.78,-2190 ; 3320,-2355 3293.78,-2355 3194.39,-2255.61 3193.78,-2255 3155,-2216.22 3128.78,-2190
  Top Layer w20: U7.5@1137.32,-3130 U7.4@1137.32,-3167.4 1137.32,-3253.86 C28.2@1140,-3256.54 1216.54,-3256.54 v2(1220,-3260) ; v5(1715,-2730) 1715,-2805 1743.75,-2833.75 2131.25,-2833.75 2185,-2780 P10.6@2195,-2780 ; P9.15@3563.82,-3455 3563.82,-3358.61 R24.1@3579,-3343.43 3580.57,-3345 R23.1@3689,-3345 ; R43.1@3920,-1870 v2@3920,-1720 ; v2(4585,-1710) U4.8@4654.65,-1710 ; U3.8@4604.41,-2274.76 4604.41,-2191.7 R72.2@4629.77,-2166.34 C32.2@4629.77,-2091.34 4575,-2036.57 v2(4575,-1935) 4575,-1865 4659.41,-1780.59 U4.8@4659.41,-1714.76 4659.41,-1646.7 R2.2@4699.77,-1606.34 C31.2@4699.77,-1531.34 4700,-1531.11 v2(4700,-1460) ; R29.2@5124.77,-441.34 5120,-436.57 5120,-350 v2(5165,-305)
  Top Layer w50: P8.7@815,-305 1540,-305 1785,-550 v2(2660,-550) v2(4060,-550) ; P10.6@2195,-2780 2220,-2805 v2(2405,-2805) ; C5.2@2363.04,-2074.72 C5.2@2367.68,-2079.36 ; D1.1@2367.68,-2205 2370,-2207.32 v2(2370,-2335) 2370,-2440.36 2367.68,-2442.68 v2(2570,-2645) 2705,-2780 2865,-2780 v2(2885,-2760) ; v2(2660,-1265) P13.1@2420,-1505 2797.76,-1882.76 2857.76,-1882.76 ; R53.1@3546,-4220 3548,-4218 3759,-4218 R57.1@3761,-4220 3763,-4218 3938,-4218 v2(3940,-4220)
  Top Layer w60: U2.3@2032.95,-1870.55 2105.55,-1870.55 2151.21,-1916.21 D3.2@2151.21,-2206.98 D1.1@2365.69,-2206.98 ; v4(2310,-1965) 2363.04,-2018.04 C5.2@2363.04,-2074.72 ; D1.1@2367.68,-2205 C5.2@2367.68,-2079.36
  Bottom Layer w10: v2@4580,-1715 v2(4585,-1710)
  Bottom Layer w15: 3289.41,-3180.59 3294.41,-3180.59
  Bottom Layer w20: P1.6@701,-2999 995,-2705 1135,-2705 1220,-2790 ; v2(1220,-3260) 1220,-2790 ; v5@1715.47,-2729.53 v5(1715,-2730) 1625,-2640 1370,-2640 1220,-2790 ; 3248.82,-3140 3250,-3140 ; 3294.41,-3180.59 P12.1@3575,-2900 ; v2(3920,-1700) 4560,-1700 4577.5,-1717.5 v2@4580,-1715 ; v2(4060,-550) 4700,-1190 v2(4700,-1460) ; P14.1@4205,-1940 4570,-1940 v2(4575,-1935) ; 4455,-305 D10.1@4455,-140 ; 4910,-305 4915,-300 D17.1@4915,-140
  Bottom Layer w30: P11.1@2100,-2520 2172.68,-2520 2357.68,-2335 v2(2370,-2335)
  Bottom Layer w50: v2(2405,-2805) 2565,-2645 v2(2570,-2645) ; v2(2660,-1265) v2(2660,-550) ; v2(2885,-2760) 2887,-2758 3133,-2758 3175,-2800 3175,-3066.18 3248.82,-3140 3289.41,-3180.59 P9.15@3563.82,-3455 3563.82,-3523.82 3990,-3950 4255,-3950 ; v2(3940,-4220) 3942,-4218 4050.68,-4218 4052.68,-4220 4175,-4220 4255,-4140 4255,-3950 ; v2(4060,-550) 4305,-305 4455,-305 4910,-305 v2(5165,-305) P4.1@5630,-305 ; P3.1@5630,-3475 5385,-3720 5385,-4080 5224.21,-4240.79 U6.10@4969.49,-4240.79 4678.7,-3950 4255,-3950
  Bottom Layer w60: v4(2310,-1965) 2310,-1655 2420,-1545 P13.1@2420,-1505
VUIM: C18.2 Card1.1 D16.3 R48.2 U8.29 | length 2899.3
  Top Layer w20: U8.29@2350.75,-3263.23 2420,-3263.23 2531.77,-3375 2562.24,-3375 C18.2@2621.96,-3315.28 ; R48.2@2624.77,-3166.34 2621.96,-3169.15 C18.2@2621.96,-3315.28 ; D16.3@3142.32,-2887.6 3187.6,-2887.6 3365,-3065 3365,-3888.32 3280,-3973.32 ; Card1.1@3280,-4210 3280,-3973.32 ; C18.2@2621.96,-3315.28 3280,-3973.32
WAKEUP_CTL: CPU1.62
pads on no net: Card1.4 CPU1.6 CPU1.73 P10.3 P10.4 P10.5 P10.9 P10.10 P13.6 P13.10 U6.6 U8.2 U8.3 U8.5 U8.6 U8.7 U8.8 U8.16 U8.25 U8.26 U8.27 U8.28 U8.36 U8.37 U8.38 U8.39 U8.40 U8.41 U8.43 U8.44 U8.45 U8.46 U8.47 U8.48 U8.49 U8.58 U8.59 U8.60 U8.61 U8.62 U8.63 U8.64 U8.65

## Polygon pours and split planes (outlines as drawn)
GND on Top Layer "Top Layer-No Net" (solid, pour order 8): 65,-415 85,-395 380,-395 380,-80 415,-45 435,-25 645,-25 2820,-25 2835,-40 2855,-60 2855,-430 2860,-430 2885,-455 3830,-455 3830,-450 3880,-400 3895,-385 3895,-50 5695,-50 5740,-95 5745,-100 5745,-455 5745,-660 5850,-765 5860,-775 5860,-1385 5860,-3940 5870,-3950 5940,-4020 5940,-4330 5135,-4330 5130,-4325 5120,-4335 3565,-4335 520,-4335 470,-4285 475,-4280 475,-3860 475,-2100 460,-2085 400,-2085 55,-2085 40,-2070 35,-2065 35,-1955 35,-445 65,-415
GND on Bottom Layer "Top Layer-No Net" (solid, pour order 10): 65,-415 85,-395 380,-395 380,-80 415,-45 435,-25 645,-25 2820,-25 2835,-40 2855,-60 2855,-430 2860,-430 2885,-455 3830,-455 3830,-450 3880,-400 3895,-385 3895,-50 5695,-50 5740,-95 5745,-100 5745,-455 5745,-660 5850,-765 5860,-775 5860,-1385 5860,-3940 5870,-3950 5940,-4020 5940,-4330 5135,-4330 5130,-4325 5120,-4335 3565,-4335 520,-4335 470,-4285 475,-4280 475,-3860 475,-2100 460,-2085 400,-2085 55,-2085 40,-2070 35,-2065 35,-1955 35,-445 65,-415

## Keep-outs
Keep-Out Layer:
  lines w5: 1660,-3081.73 1660,-2995.12 1840.91,-2995.12 1840.91,-3081.73 1660,-3081.73 ; 3790,-440 3803.58,-440 3790,-440
  lines w10: 15,-4141 15,-3976 cw(c65,-3976) 65,-3926 399,-3926 ccw(c397,-3875) 448,-3873 ; 15,-4129 ccw(c225,-4136) 218,-4346 ; 15,-2058.11 15,-1999 ; 15,-2011 15,-1902 ; 15,-2009 15,-1900 ; 15,-1997 15,-2056.11 ccw(c60.89,-2056.11) 60.89,-2102 398.91,-2102 ; 15,-1921 15,-200 ; 15,-213.85 cw(c211.2,-213.2) 211.85,-17 ; 15,-211.85 cw(c211.2,-211.2) 211.85,-15 2810.28,-15 2819.33,-15 cw(c2819.33,-65) 2869.33,-65 2869.33,-390 ccw(c2919.33,-390) 2919.33,-440 2928.39,-440 3794.53,-440 ; 218,-4345.71 3440.2,-4345.71 ; 393,-2102 cw(c395.5,-2154.5) 448,-2152 ; 448.07,-3876 448.07,-2152.16 ; 3441.2,-4345.71 6131,-4345.71 ; 3803.58,-440 ccw(c3803.58,-390) 3853.58,-390 ; 3853.58,-385 3853.58,-60 cw(c3898.58,-60) 3898.58,-15 3912.64,-15 5718.03,-15 cw(c5718.03,-60) 5763.03,-60 5763.03,-416.4 ; 5762.53,-407.95 ccw(c5841.09,-415.7) 5841.19,-494.64 ; 5841.09,-495.14 6268,-495.14 ; 5881,-3882 ccw(c5925,-3882) 5925,-3926 6264,-3926 ; 5881,-951 cw(c5913,-949) 5911,-917 6282,-917 ccw(c6279,-882) 6314,-879 ; 5881.14,-3881 5881.14,-949 ; 6130,-4346 ccw(c6111,-4143) 6314,-4124 ; 6264,-3928 cw(c6264,-3978) 6314,-3978 6314,-3990 ; 6266,-495 cw(c6267.5,-541.5) 6314,-540 ; 6314,-4132 6314,-3976 ; 6314,-3988 6314,-3976 ; 6314,-539 6314.21,-883 ; 6264,-3926 cw(c6264,-3976) 6314,-3976 ; 6264,-3926 cw(c6264,-3976) 6314,-3976

## Other copper
Top Layer:
  rectangle net NetC27_1: 570,-3290 740,-3240
  rectangle net NetC30_2: 675,-3675 855,-3625
  rectangle net DGND: 75,-2040 145,-1565
  rectangle net INVCC: 660,-2032 744,-1737
  rectangle net 24V+: 815,-1635 895,-1030
  rectangle net 24V+: 450,-1100 895,-1015
  rectangle net 24V+: 435,-1100 520,-655
  rectangle net 24V+: 1570,-1880 1690,-1725
  rectangle net NetD4_2: 1580,-1710 1785,-1660
  rectangle net NetR1_2: 1580,-1580 1825,-1520
  rectangle net NetR1_2: 1740,-1580 1830,-1380
  rectangle net NetD4_2: 1720,-2045 1815,-1660
  rectangle net NetD4_2: 1210,-2045 1815,-1950
  rectangle net NetD4_2: 1210,-2315 1315,-1955
  rectangle net VBAT: 1545,-2270 2035,-2115
  rectangle net VBAT: 1980,-2235 2035,-2020
  rectangle net VCC: 2825,-1915 2885,-1845
  rectangle net GND: 525,-3365 790,-3315
  rectangle net GND: 525,-3215 790,-3165
  rectangle net GND: 625,-3600 885,-3550
  rectangle net GND: 625,-3750 885,-3700
  rectangle net GND: 640,-3175 675,-3125
  rectangle net GND: 640,-3405 675,-3355
  rectangle net GND: 740,-3560 775,-3510
  rectangle net GND: 745,-3780 780,-3730
  pour cut-out: 495,-3285 495,-3305 505,-3305 510,-3310 520,-3300 520,-3292.35 512.65,-3285
  pour cut-out: 630,-2305 630,-2880 775,-2880 795,-2860 795,-2305
  pour cut-out: 1850,-2570 2045,-2570 2050,-2565 2050,-2470 1850,-2470
  pour cut-out: 3990,-4135 3990,-4055 4005,-4040 4155,-4040 4155,-4140 4150,-4135
  pour cut-out: 4520,-3130 4520,-3230 4525,-3225 5020,-3225 5020,-3130 5015,-3125 5010,-3130
  pour cut-out: 4620,-4190 4620,-4295 4820,-4295 4815,-4290 4815,-4190
  pour cut-out: 5577,-446 5577,-460 5625,-460 5682,-460 5682,-655 5577,-655
  pour cut-out: 5582,-1081 5585,-1090 5635,-1090 5687,-1090 5687,-1290 5582,-1290
  pour cut-out: 5575,-1721 5575,-1735 5675,-1735 5680,-1733.56 5680,-1930 5575,-1930
  pour cut-out: 5578,-2351 5578,-2360 5630,-2360 5680,-2360 5683,-2560 5578,-2560
  pour cut-out: 5580,-3630 5580,-3825 5685,-3825 5680,-3820 5680,-3630
  pour cut-out: 5575,-2986 5576,-2985 5680,-2985 5680,-3195 5575,-3195
  pour cut-out: 2280,-1065 2280,-1345 2360,-1345 2380,-1365 2380,-1440 2445,-1440 2465,-1420 2465,-1060 2285,-1060
  pour cut-out: 1795,-1175 1795,-1255 1800,-1250 2175,-1250 2175,-1175
  pour cut-out: 520,-3215 515,-3220 515,-3240 740,-3240 745,-3245 795,-3245 795,-3220 790,-3215
  pour cut-out: 515,-3315 510,-3310 520,-3300 520,-3290 740,-3290 745,-3285 795,-3285 795,-3310 790,-3315
  pour cut-out: 525,-3365 790,-3365 790,-3400 525,-3400 520,-3395 525,-3390
  pour cut-out: 525,-3165 525,-3135 530,-3130 795,-3130 795,-3160 790,-3165
  pour cut-out: 620,-3600 620,-3625 855,-3625 860,-3630 985,-3630 985,-3605 980,-3600
  pour cut-out: 620,-3675 615,-3680 620,-3685 620,-3700 930,-3700 930,-3695 930,-3690 930,-3680 930,-3675
  pour cut-out: 620,-3550 620,-3520 900,-3520 895,-3525 895,-3550
  pour cut-out: 620,-3780 620,-3750 900,-3750 895,-3755 895,-3780
  pour cut-out: 575,-3625 575,-3675 580,-3680 582.5,-3677.5 622.5,-3677.5 630,-3670 630,-3625
  pour cut-out: 525,-3240 520,-3245 520,-3290 500,-3290 495,-3285 495,-3245 510,-3245 515,-3240
Bottom Layer:
  pour cut-out: 630,-2305 630,-2880 785,-2880 800,-2865 795,-2860 795,-2300 635,-2300
  pour cut-out: 1850,-2470 1850,-2570 2045,-2570 2050,-2565 2050,-2470
  pour cut-out: 1950,-2830 2140,-2830 2140,-2635 1955,-2635 1950,-2630
  pour cut-out: 4005,-4040 3990,-4055 3990,-4135 4155,-4135 4155,-4040
  pour cut-out: 4520,-3130 4520,-3225 5015,-3225 5020,-3220 5020,-3130
  pour cut-out: 4620,-4190 4620,-4295 4815,-4295 4820,-4290 4815,-4285 4815,-4190
  pour cut-out: 5580,-2990 5680,-2990 5680,-3185 5580,-3185
  pour cut-out: 5580,-1735 5680,-1735 5680,-1930 5580,-1930
  pour cut-out: 5580,-1090 5680,-1090 5680,-1285 5580,-1285
  pour cut-out: 5580,-460 5680,-460 5680,-655 5580,-655
  pour cut-out: 5575,-2351 5575,-2360 5627,-2360 5680,-2360 5680,-2560 5575,-2560
  pour cut-out: 5580,-3630 5680,-3630 5680,-3825 5580,-3825
  pour cut-out: 2285,-1060 2275,-1070 2275,-1340 2280,-1345 2365,-1345 2365,-1350 2380,-1365 2380,-1440 2460,-1440 2470,-1430 2470,-1060 2465,-1055 2460,-1060
  pour cut-out: 1795,-1175 1795,-1255 2175,-1255 2175,-1175

## Silkscreen, mask and mechanical layers (free items; w line width, h text height)
Top Overlay:
  text "24V+" at 890,-100 h30
  text "GND" at 900,-215 h30
  text "VCC" at 5730,-310 h30 r90
  text "VCC" at 895,-320 h30
  text "GND" at 5735,-435 h30 r90
  text "DATE4" at 5695,-560 h30
  text "SCK" at 5705,-640 h30
  text "24VOUT" at 5695,-995 h30
  text "GND" at 5695,-1075 h30
  text "DATE5" at 5695,-1155 h30
  text "SCK" at 5695,-1260 h30
  text "24VOUT" at 5690,-1575 h30
  text "GND" at 5695,-1695 h30
  text "AIO2" at 5695,-1790 h30
  text "BIO2" at 5690,-1885 h30
  text "VCC" at 4270,-1955 h30
  text "GND" at 4275,-2055 h30
  text "PA0" at 4270,-2160 h30
  text "24VOUT" at 5690,-2215 h30
  text "GND" at 5690,-2320 h30
  text "TX" at 895,-2410 h30
  text "DATE1" at 5700,-2415 h30
  text "DATE2" at 5695,-2520 h30
  text "UART3" at 530,-2545 h30 r90
  text "RX" at 900,-2610 h30
  text "CK" at 910,-2800 h30
  text "24VOUT" at 5690,-2855 h30
  text "GND" at 5700,-2940 h30
  text "AIO3" at 5695,-3050 h30
  text "PA5" at 4860,-3095 h30 r90
  text "PA7" at 4680,-3100 h30 r90
  text "PA6" at 4765,-3100 h30 r90
  text "NSEL" at 4585,-3105 h30 r90
  text "NIRQ" at 4940,-3105 h30 r90
  text "BIO3" at 5695,-3170 h30
  text "VCC" at 5730,-3475 h30
  text "GND" at 5715,-3585 h30
  text "DATE3" at 5695,-3675 h30
  text "SCK" at 5620,-3865 h30
  text "PB6" at 4675,-4170 h30 r90
  text "PB7" at 4785,-4170 h30 r90
  text "GND" at 4895,-4180 h30 r90
  text "VCC" at 4965,-4180 h30 r90
Mechanical 1:
  circle w10: c1595,-2735 r60

## Text inside footprints (layer, text, board x,y; h text height)
C1: Top Overlay "+" at 495,-805 h20 r90
C4: Top Overlay "+" at 485,-1370 h20 r90
P10: Top Overlay "6" at 2295,-2760 h20 r180; Top Overlay "10" at 1735,-2760 h20 r180; Top Overlay "5" at 1735,-2660 h20 r180; Top Overlay "1" at 2295,-2660 h20 r180
P13: Top Overlay "10" at 2335,-1025 h30 r180; Top Overlay "5" at 2440,-1020 h30 r180; Top Overlay "1" at 2500,-1485 h20 r180